# EAGLE board mega_pro-v13 (EAGLE 6.5.0)
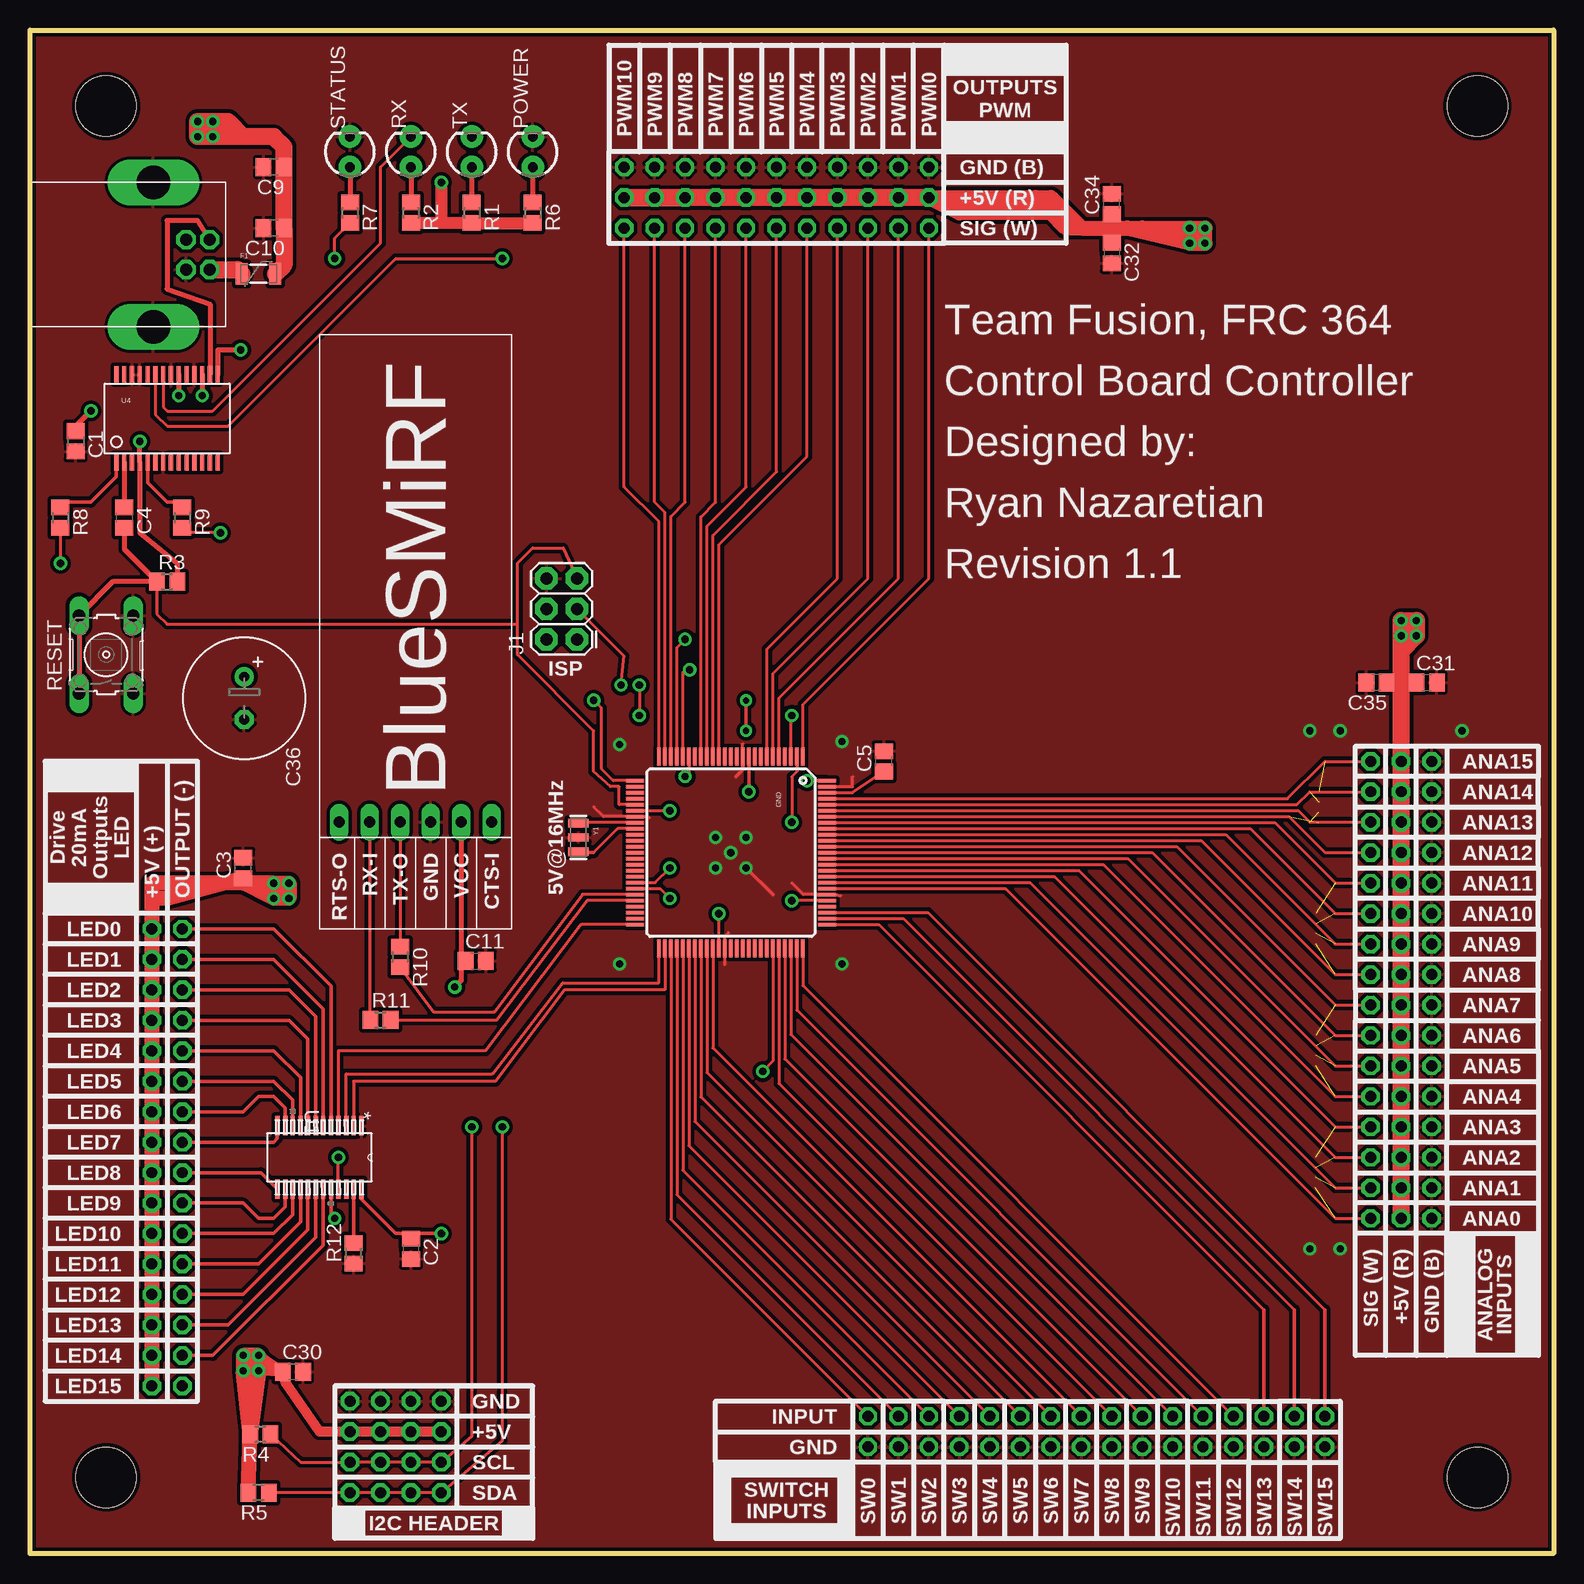
[diagram p0: board, top side]
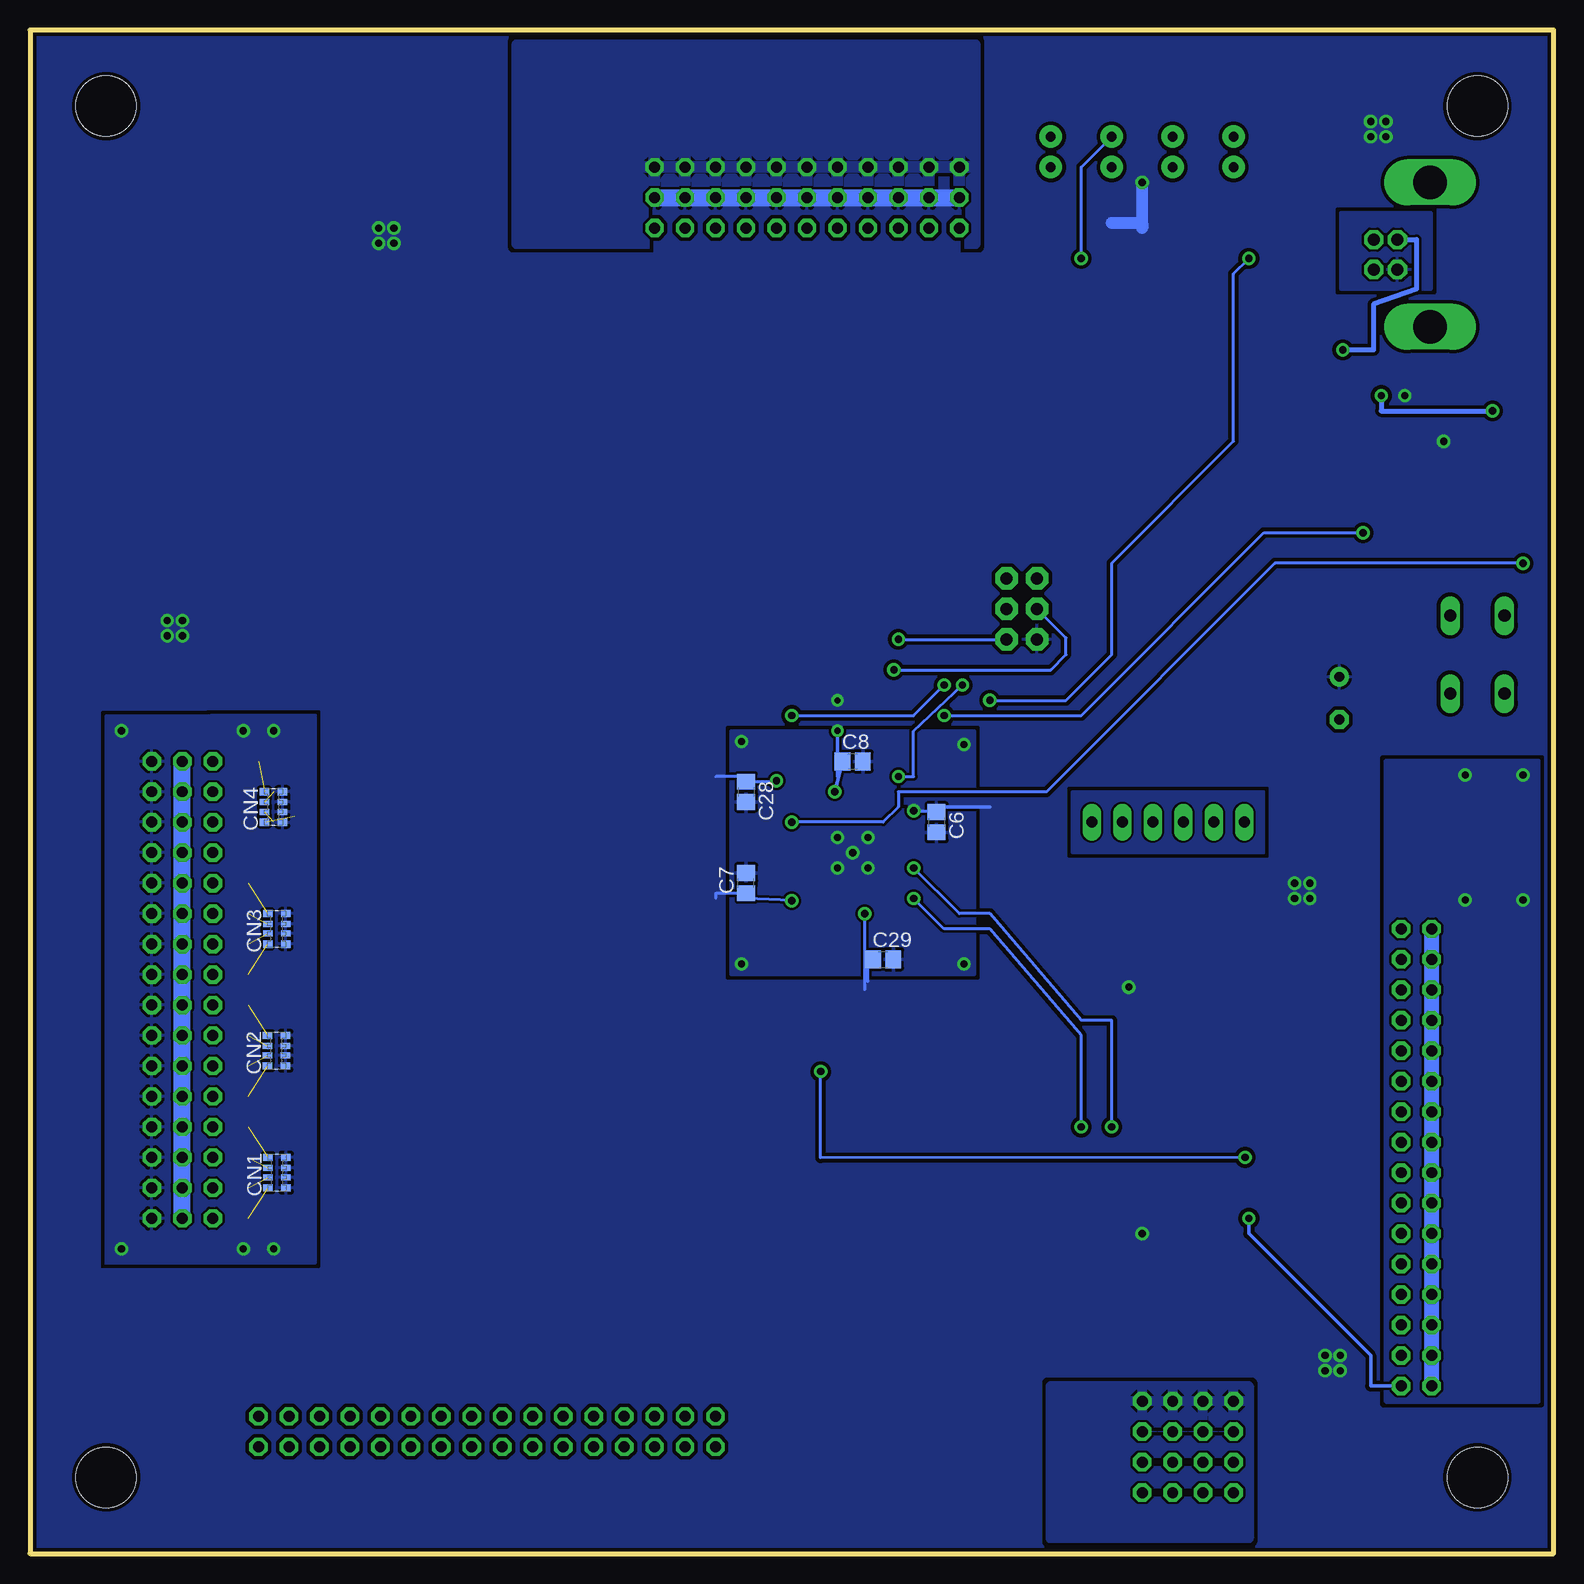
[diagram p1: board, bottom side, seen from below]

Size 127 x 127 mm. Coordinates in mm from the lower left corner, seen from the top.
Outline: 0,0 0,127 127,127 127,0 0,0
Copper layers (1*16): Top 0.035mm / dielectric 1.5mm / Bottom 0.035mm
Design rules "SparkFun": minimum track width 8mil, minimum drill 20mil, track to track 8mil, track to pad 8mil, pad to pad 8mil, via to via 8mil, smd to smd 8mil, copper to edge 10mil, drill to drill 8mil, minimum pad ring 12mil, minimum via ring 10mil, stop-mask expansion 4mil, vias tented up to drill 25mil, thermal gap 10mil
Net classes: 0 default: width 0.203 mm; 1 power: width 0.254 mm
Holes 5.03 mm at 6.35,120.65 120.65,120.65 120.65,6.35 6.35,6.35

## Footprints (pad centres in the part's own frame; a part is rotated, then mirrored left to right if it is on the bottom)
C0805 = smd 1.3 x 1.5: 1 -0.85,0; 2 0.85,0
E3,5-10 = drill 0.813 pad 1.6: + -1.778,0 | drill 0.813 pad 1.6 octagon: - 1.778,0
EXB38V = smd 0.6 x 0.8: 1 -1.275,-0.75; 4 1.275,-0.75; 5 1.275,0.75; 8 -1.275,0.75 | smd 0.5 x 0.8: 2 -0.4,-0.75; 3 0.4,-0.75; 6 0.4,0.75; 7 -0.4,0.75
PTC-1206 = smd 1 x 1.8: 1 -1.4,0; 2 1.4,0
TQFP100 = smd 1.5 x 0.3: 1 -8,6; 2 -8,5.5; 3 -8,5; 4 -8,4.5; 5 -8,4; 6 -8,3.5; 7 -8,3; 8 -8,2.5; 9 -8,2; 10 -8,1.5; 11 -8,1; 12 -8,0.5; 13 -8,0; 14 -8,-0.5; 15 -8,-1; 16 -8,-1.5; 17 -8,-2; 18 -8,-2.5; 19 -8,-3; 20 -8,-3.5; 21 -8,-4; 22 -8,-4.5; 23 -8,-5; 24 -8,-5.5; 25 -8,-6; 51 8,-6; 52 8,-5.5; 53 8,-5; 54 8,-4.5; 55 8,-4; 56 8,-3.5; 57 8,-3; 58 8,-2.5; 59 8,-2; 60 8,-1.5; 61 8,-1; 62 8,-0.5; 63 8,0; 64 8,0.5; 65 8,1; 66 8,1.5; 67 8,2; 68 8,2.5; 69 8,3; 70 8,3.5; 71 8,4; 72 8,4.5; 73 8,5; 74 8,5.5; 75 8,6 | smd 0.3 x 1.5: 26 -6,-8; 27 -5.5,-8; 28 -5,-8; 29 -4.5,-8; 30 -4,-8; 31 -3.5,-8; 32 -3,-8; 33 -2.5,-8; 34 -2,-8; 35 -1.5,-8; 36 -1,-8; 37 -0.5,-8; 38 0,-8; 39 0.5,-8; 40 1,-8; 41 1.5,-8; 42 2,-8; 43 2.5,-8; 44 3,-8; 45 3.5,-8; 46 4,-8; 47 4.5,-8; 48 5,-8; 49 5.5,-8; 50 6,-8; 76 6,8; 77 5.5,8; 78 5,8; 79 4.5,8; 80 4,8; 81 3.5,8; 82 3,8; 83 2.5,8; 84 2,8; 85 1.5,8; 86 1,8; 87 0.5,8; 88 0,8; 89 -0.5,8; 90 -1,8; 91 -1.5,8; 92 -2,8; 93 -2.5,8; 94 -3,8; 95 -3.5,8; 96 -4,8; 97 -4.5,8; 98 -5,8; 99 -5.5,8; 100 -6,8
2X3 = drill 1.016 pad 1.88 octagon: 1 0,0; 2 0,2.54; 3 2.54,0; 4 2.54,2.54; 5 5.08,0; 6 5.08,2.54
LED3MM = drill 0.813 pad 1.88: A -1.27,0; K 1.27,0
R0805 = smd 1.3 x 1.5: 1 -0.85,0; 2 0.85,0
B3F-10XX = drill 1.016 long: 1 -3.251,2.261; 2 3.251,2.261; 3 -3.251,-2.261; 4 3.251,-2.261
DBQ24 = smd 1.6 x 0.356: 1 -2.642,3.505; 2 -2.642,2.845; 3 -2.642,2.235; 4 -2.642,1.575; 5 -2.642,0.965; 6 -2.642,0.305; 7 -2.642,-0.305; 8 -2.642,-0.965; 9 -2.642,-1.575; 10 -2.642,-2.235; 11 -2.642,-2.845; 12 -2.642,-3.505; 13 2.642,-3.505; 14 2.642,-2.845; 15 2.642,-2.235; 16 2.642,-1.575; 17 2.642,-0.965; 18 2.642,-0.305; 19 2.642,0.305; 20 2.642,0.965; 21 2.642,1.575; 22 2.642,2.235; 23 2.642,2.845; 24 2.642,3.505
SSOP28DB = smd 0.348 x 1.397: 1 -4.225,-3.656; 2 -3.575,-3.656; 3 -2.925,-3.656; 4 -2.275,-3.656; 5 -1.625,-3.656; 6 -0.975,-3.656; 7 -0.325,-3.656; 8 0.325,-3.656; 9 0.975,-3.656; 10 1.625,-3.656; 11 2.275,-3.656; 12 2.925,-3.656; 13 3.575,-3.656; 14 4.225,-3.656; 15 4.225,3.656; 16 3.575,3.656; 17 2.925,3.656; 18 2.275,3.656; 19 1.625,3.656; 20 0.975,3.656; 21 0.325,3.656; 22 -0.325,3.656; 23 -0.975,3.656; 24 -1.625,3.656; 25 -2.275,3.656; 26 -2.925,3.656; 27 -3.575,3.656; 28 -4.225,3.656
DIGITALIN = drill 0.914 octagon: DI0 -17.78,2.54; DI1 -15.24,2.54; DI2 -12.7,2.54; DI3 -10.16,2.54; DI4 -7.62,2.54; DI5 -5.08,2.54; DI6 -2.54,2.54; DI7 0,2.54; DI8 2.54,2.54; DI9 5.08,2.54; DI10 7.62,2.54; DI11 10.16,2.54; DI12 12.7,2.54; DI13 15.24,2.54; DI14 17.78,2.54; DI15 20.32,2.54; GND@0 -17.78,0; GND@1 -15.24,0; GND@2 -12.7,0; GND@3 -10.16,0; GND@4 -7.62,0; GND@5 -5.08,0; GND@6 -2.54,0; GND@7 0,0; GND@8 2.54,0; GND@9 5.08,0; GND@10 7.62,0; GND@11 10.16,0; GND@12 12.7,0; GND@13 15.24,0; GND@14 17.78,0; GND@15 20.32,0
PWMHEADER = drill 0.914 octagon: 0 1.27,11.43; 1 1.27,13.97; 2 1.27,16.51; 3 1.27,19.05; 4 1.27,21.59; 5 1.27,24.13; 6 1.27,26.67; 7 1.27,29.21; 8 1.27,31.75; 9 1.27,34.29; 10 1.27,36.83; +5V@3 3.81,36.83; +5V@4 3.81,34.29; +5V@5 3.81,31.75; +5V@6 3.81,29.21; +5V@7 3.81,26.67; +5V@8 3.81,24.13; +5V@9 3.81,21.59; +5V@10 3.81,19.05; +5V@11 3.81,16.51; +5V@12 3.81,13.97; +5V@13 3.81,11.43; GND@3 6.35,36.83; GND@4 6.35,34.29; GND@5 6.35,31.75; GND@6 6.35,29.21; GND@7 6.35,26.67; GND@8 6.35,24.13; GND@9 6.35,21.59; GND@10 6.35,19.05; GND@11 6.35,16.51; GND@12 6.35,13.97; GND@13 6.35,11.43
DIGITALOUT = drill 0.914 octagon: +5V@0 -15.24,-1.27; +5V@1 -12.7,-1.27; +5V@2 -10.16,-1.27; +5V@3 -7.62,-1.27; +5V@4 -5.08,-1.27; +5V@5 -2.54,-1.27; +5V@6 0,-1.27; +5V@7 2.54,-1.27; +5V@8 5.08,-1.27; +5V@9 7.62,-1.27; +5V@10 10.16,-1.27; +5V@11 12.7,-1.27; +5V@12 15.24,-1.27; +5V@13 17.78,-1.27; +5V@14 20.32,-1.27; +5V@15 22.86,-1.27; DO0 -15.24,1.27; DO1 -12.7,1.27; DO2 -10.16,1.27; DO3 -7.62,1.27; DO4 -5.08,1.27; DO5 -2.54,1.27; DO6 0,1.27; DO7 2.54,1.27; DO8 5.08,1.27; DO9 7.62,1.27; DO10 10.16,1.27; DO11 12.7,1.27; DO12 15.24,1.27; DO13 17.78,1.27; DO14 20.32,1.27; DO15 22.86,1.27
ANALOGHEADER = drill 0.914 octagon: 0 1.27,11.43; 1 1.27,13.97; 2 1.27,16.51; 3 1.27,19.05; 4 1.27,21.59; 5 1.27,24.13; 6 1.27,26.67; 7 1.27,29.21; 8 1.27,31.75; 9 1.27,34.29; 10 1.27,36.83; 11 1.27,39.37; 12 1.27,41.91; 13 1.27,44.45; 14 1.27,46.99; 15 1.27,49.53; +5V@0 3.81,11.43; +5V@1 3.81,13.97; +5V@2 3.81,16.51; +5V@3 3.81,19.05; +5V@4 3.81,21.59; +5V@5 3.81,24.13; +5V@6 3.81,26.67; +5V@7 3.81,29.21; +5V@8 3.81,31.75; +5V@9 3.81,34.29; +5V@10 3.81,36.83; +5V@11 3.81,39.37; +5V@12 3.81,41.91; +5V@13 3.81,44.45; +5V@14 3.81,46.99; +5V@15 3.81,49.53; GND@0 6.35,11.43; GND@1 6.35,13.97; GND@2 6.35,16.51; GND@3 6.35,19.05; GND@4 6.35,21.59; GND@5 6.35,24.13; GND@6 6.35,26.67; GND@7 6.35,29.21; GND@8 6.35,31.75; GND@9 6.35,34.29; GND@10 6.35,36.83; GND@11 6.35,39.37; GND@12 6.35,41.91; GND@13 6.35,44.45; GND@14 6.35,46.99; GND@15 6.35,49.53
UE27BC54130-USB = drill 1 octagon: +5V 7.264,14.986; +DATA 4.775,13.005; -DATA 4.775,14.986; GND@0 7.264,13.005 | drill 2.8 long: GND@1 0,10.287; GND@2 12.04,10.287
I2CHEADER = drill 0.914 octagon: GND@0 1.27,1.27; GND@1 3.81,1.27; GND@2 6.35,1.27; GND@3 8.89,1.27; SCL@0 1.27,6.35; SCL@1 3.81,6.35; SCL@2 6.35,6.35; SCL@3 8.89,6.35; SDA@0 1.27,8.89; SDA@1 3.81,8.89; SDA@2 6.35,8.89; SDA@3 8.89,8.89; VCC@0 1.27,3.81; VCC@1 3.81,3.81; VCC@2 6.35,3.81; VCC@3 8.89,3.81
BLUESMIRF = drill 0.914 long: CTS-I 40.64,14.351; GND 40.64,9.271; RTS-O 40.64,1.651; RX-I 40.64,4.191; TX-O 40.64,6.731; VCC 40.64,11.811
RESONATOR-SMD = smd 0.7 x 1.7: 1 -1.2,0; 2 0,0; 3 1.2,0

## Placement (x,y rotation side)
C1  0.1uF  [C0805]  3.81,92.71 270 top
C2  0.1uF  [C0805]  31.75,25.4 270 top
C3  10uF  [C0805]  17.78,57.15 90 top
C4  0.1uF  [C0805]  7.86,86.36 270 top
C5  0.1uF  [C0805]  71.18,66.04 90 top
C6  0.1uF  [C0805]  51.44,60.96 270 bottom
C7  0.1uF  [C0805]  67.31,55.88 90 bottom
C8  0.1uF  [C0805]  58.42,66.04 0 bottom
C9  0.1uF  [C0805]  20.32,115.57 180 top
C10  10uF  [C0805]  20.32,110.49 180 top
C11  10uF  [C0805]  37.16,49.4 0 top
C28  0.1uF  [C0805]  67.31,63.5 270 bottom
C29  0.1uF  [C0805]  55.88,49.53 0 bottom
C30  10uF  [C0805]  21.92,15.16 0 top
C31  10uF  [C0805]  116.43,72.59 0 top
C32  10uF  [C0805]  90.17,108.41 270 top
C34  0.1uF  [C0805]  90.17,112.5 90 top
C35  0.1uF  [C0805]  112.24,72.59 180 top
C36  470uF  [E3,5-10]  17.86,71.3 270 top
CN1  1uF  [EXB38V]  106.4,31.75 90 bottom
CN2  1uF  [EXB38V]  106.45,41.91 90 bottom
CN3  1uF  [EXB38V]  106.43,52.07 90 bottom
CN4  1uF  [EXB38V]  106.71,62.23 90 bottom
F1  500mA  [PTC-1206]  19.05,106.68 0 top
GND  ATMEGA2560AU  [TQFP100]  58.42,58.42 270 top
J1  AVR_SPI_PRG_6PTH  [2X3]  45.59,76.2 90 top
POWER  [LED3MM]  41.91,116.84 90 top
R1  140  [R0805]  36.83,111.76 270 top
R2  157.5  [R0805]  31.75,111.76 270 top
R3  10k  [R0805]  11.43,81 0 top
R4  10k  [R0805]  19.2,9.93 180 top
R5  10k  [R0805]  19.05,5.08 180 top
R6  85  [R0805]  41.91,111.76 270 top
R7  150  [R0805]  26.67,111.76 270 top
R8  1K  [R0805]  2.54,86.36 270 top
R9  1K  [R0805]  12.7,86.36 270 top
R10  1K  [R0805]  30.86,49.73 270 top
R11  1K  [R0805]  29.21,44.48 0 top
R12  2.52K  [R0805]  26.97,25.02 90 top
RESET  [B3F-10XX]  6.35,74.93 90 top
RX  [LED3MM]  31.75,116.84 90 top
STATUS  [LED3MM]  26.67,116.84 90 top
TX  [LED3MM]  36.83,116.84 90 top
U1  TLC59282_DBQ_24  [DBQ24]  24.13,33.02 270 top
U4  FT232RLSSOP  [SSOP28DB]  11.43,94.61 0 top
U$2  DIGITALIN  [DIGITALIN]  87.63,8.89 0 top
U$10  PWMHEADER  [PWMHEADER]  86.36,109.22 90 top
U$11  DIGITALOUTPUTS  [DIGITALOUT]  11.43,36.83 270 top
U$12  ANALOGHEADER  [ANALOGHEADER]  110.49,16.51 0 top
U$14  UE27BC54130-USB  [UE27BC54130-USB]  0,114.3 270 top
U$15  I2CHEADER  [I2CHEADER]  35.56,13.97 180 top
U$19  BLUESMIRF  [BLUESMIRF]  24.13,101.6 270 top
Y1  RESONATORSMD  [RESONATOR-SMD]  45.72,59.69 270 top

## Library data of the parts
C1-C11 C28-C32 C34-C36 R1-R12 = resistor
CN1-CN4 = resistor-dil; OC_FARNELL: unknown; OC_NEWARK: unknown
F1 = SparkFun-PowerIC; PROD_ID: RES-11150
GND J1 U4 Y1 = SparkFun
POWER RX STATUS TX = SparkFun-LED
RESET = switch-omron; MPN: B3F-1000; OC_FARNELL: 176432; OC_NEWARK: 36M3542
U1 = teamFusion; DATASHEETURL: http://www.ti.com/lit/gpn/TLC59282; DESCRIPTION: 16-Channel Constant Current LED Driver with 4-Channel Grouped Delay; FAMILY_NAME: LED DRIVER; GENERIC_PART_NUMBER: TLC59282; INDUSTRY_STD_PKG_TYPE: SSOP/QSOP; MANUFACTURER: Texas Instruments; MANUFACTURER_PART_NUMBER: tlc59282_dbq_24; PACKAGE_DESIGNATOR: DBQ; PIN_COUNT: 24; VENDOR: Texas Instruments
U$2 U$10-U$12 U$14 U$15 U$19 = teamFusion

## Nets
5V [power]: C2.1 C3.1 C6.1 C7.1 C8.1 C9.1 C10.1 C11.1 C28.1 C29.1 C30.1 C31.1 C32.1 C34.1 C35.1 C36.+ F1.2 GND.10 GND.31 GND.61 GND.80 GND.100 J1.2 R1.2 R2.2 R3.2 R4.2 R5.2 R6.2 U1.24 U4.4 U4.20 U$10.+5V@3 U$10.+5V@4 U$10.+5V@5 U$10.+5V@6 U$10.+5V@7 U$10.+5V@8 U$10.+5V@9 U$10.+5V@10 U$10.+5V@11 U$10.+5V@12 U$10.+5V@13 U$11.+5V@0 U$11.+5V@1 U$11.+5V@2 U$11.+5V@3 U$11.+5V@4 U$11.+5V@5 U$11.+5V@6 U$11.+5V@7 U$11.+5V@8 U$11.+5V@9 U$11.+5V@10 U$11.+5V@11 U$11.+5V@12 U$11.+5V@13 U$11.+5V@14 U$11.+5V@15 U$12.+5V@0 U$12.+5V@1 U$12.+5V@2 U$12.+5V@3 U$12.+5V@4 U$12.+5V@5 U$12.+5V@6 U$12.+5V@7 U$12.+5V@8 U$12.+5V@9 U$12.+5V@10 U$12.+5V@11 U$12.+5V@12 U$12.+5V@13 U$12.+5V@14 U$12.+5V@15 U$15.VCC@0 U$15.VCC@1 U$15.VCC@2 U$15.VCC@3 U$19.VCC
A0: CN4.5 GND.97 U$12.15
A1: CN4.6 GND.96 U$12.14
A2: CN4.7 GND.95 U$12.13
A3: CN4.8 GND.94 U$12.12
A4: CN3.5 GND.93 U$12.11
A5: CN3.6 GND.92 U$12.10
A6: CN3.7 GND.91 U$12.9
A7: CN3.8 GND.90 U$12.8
A8: CN2.5 GND.89 U$12.7
A9: CN2.6 GND.88 U$12.6
A10: CN2.7 GND.87 U$12.5
A11: CN2.8 GND.86 U$12.4
A12: CN1.5 GND.85 U$12.3
A13: CN1.6 GND.84 U$12.2
A14: CN1.7 GND.83 U$12.1
A15: CN1.8 GND.82 U$12.0
AREF: C5.1 GND.98
DIO0(RX0-I): GND.2 R8.2
DIO1(TX0-O): GND.3 R9.2
DIO2(PWM0): GND.6 U$10.2
DIO3(PWM1): GND.7 U$10.3
DIO4(PWM2): GND.1 U$10.0
DIO5(PWM3): GND.5 U$10.1
DIO6(PWM4): GND.15 U$10.4
DIO7(PWM5): GND.16 U$10.5
DIO8(PWM6): GND.17 U$10.6
DIO9(PWM7): GND.18 U$10.7
DIO10(PWM8): GND.23 U$10.8
DIO11(PWM9): GND.24 U$10.9
DIO12(PWM10): GND.25 U$10.10
DIO13: GND.26 R7.2
DIO14(TX3): GND.64
DIO15(RX3): GND.63
DIO16(TX2): GND.13
DIO17(RX2): GND.12
DIO18(TX1): GND.46 R11.2
DIO19(RX1): GND.45 R10.2
DIO20(SDA): GND.44 R5.1 U$15.SDA@0 U$15.SDA@1 U$15.SDA@2 U$15.SDA@3
DIO21(SCL): GND.43 R4.1 U$15.SCL@0 U$15.SCL@1 U$15.SCL@2 U$15.SCL@3
DIO22: GND.78 U$2.DI15
DIO23: GND.77 U$2.DI14
DIO24: GND.76 U$2.DI13
DIO25: GND.75 U$2.DI12
DIO26: GND.74 U$2.DI11
DIO27: GND.73 U$2.DI10
DIO28: GND.72 U$2.DI9
DIO29: GND.71 U$2.DI8
DIO30: GND.60 U$2.DI7
DIO31: GND.59 U$2.DI6
DIO32: GND.58 U$2.DI5
DIO33: GND.57 U$2.DI4
DIO34: GND.56 U$2.DI3
DIO35: GND.55 U$2.DI2
DIO36: GND.54 U$2.DI1
DIO37: GND.53 U$2.DI0
DIO38: GND.50 U1.4
DIO39: GND.70 U1.21
DIO40: GND.52 U1.2
DIO41: GND.51 U1.3
DIO42: GND.42
DIO43: GND.41
DIO44(PWM11): GND.40
DIO45(PWM12): GND.39
DIO46(PWM13): GND.38
DIO47: GND.37
DIO48: GND.36
DIO49: GND.35
DIO50(MISO): GND.22 J1.1
DIO51(MOSI): GND.21 J1.4
DIO52(SCK): GND.20 J1.3
DIO53: GND.19
DTR: C4.1 U4.2
GND [power]: C1.2 C2.2 C3.2 C5.2 C6.2 C7.2 C8.2 C9.2 C10.2 C11.2 C28.2 C29.2 C30.2 C31.2 C32.2 C34.2 C35.2 C36.- CN1.1 CN1.2 CN1.3 CN1.4 CN2.1 CN2.2 CN2.3 CN2.4 CN3.1 CN3.2 CN3.3 CN3.4 CN4.1 CN4.2 CN4.3 CN4.4 GND.11 GND.32 GND.62 GND.81 GND.99 J1.6 POWER.K R12.1 RESET.3 RESET.4 STATUS.K U1.1 U4.7 U4.18 U4.21 U4.25 U4.26 U$2.GND@0 U$2.GND@1 U$2.GND@2 U$2.GND@3 U$2.GND@4 U$2.GND@5 U$2.GND@6 U$2.GND@7 U$2.GND@8 U$2.GND@9 U$2.GND@10 U$2.GND@11 U$2.GND@12 U$2.GND@13 U$2.GND@14 U$2.GND@15 U$10.GND@3 U$10.GND@4 U$10.GND@5 U$10.GND@6 U$10.GND@7 U$10.GND@8 U$10.GND@9 U$10.GND@10 U$10.GND@11 U$10.GND@12 U$10.GND@13 U$12.GND@0 U$12.GND@1 U$12.GND@2 U$12.GND@3 U$12.GND@4 U$12.GND@5 U$12.GND@6 U$12.GND@7 U$12.GND@8 U$12.GND@9 U$12.GND@10 U$12.GND@11 U$12.GND@12 U$12.GND@13 U$12.GND@14 U$12.GND@15 U$14.GND@0 U$14.GND@1 U$14.GND@2 U$15.GND@0 U$15.GND@1 U$15.GND@2 U$15.GND@3 U$19.GND Y1.2
N$1: R1.1 TX.A
N$2: POWER.A R6.1
N$3: R7.1 STATUS.A
N$4: F1.1 U$14.+5V
N$5: R2.1 RX.A
N$9: R10.1 U$19.TX-O
N$10: R11.1 U$19.RX-I
N$21: C1.1 U4.17
N$25 [power]: U1.6 U$11.DO1
N$26 [power]: U1.7 U$11.DO2
N$27 [power]: U1.5 U$11.DO0
N$28 [power]: U1.8 U$11.DO3
N$29 [power]: U1.9 U$11.DO4
N$30 [power]: U1.10 U$11.DO5
N$31 [power]: U1.11 U$11.DO6
N$32 [power]: U1.12 U$11.DO7
N$33 [power]: U1.20 U$11.DO15
N$34 [power]: U1.19 U$11.DO14
N$35 [power]: U1.18 U$11.DO13
N$36 [power]: U1.17 U$11.DO12
N$37 [power]: U1.16 U$11.DO11
N$38 [power]: U1.15 U$11.DO10
N$39 [power]: U1.14 U$11.DO9
N$40 [power]: U1.13 U$11.DO8
N$41 [power]: R12.2 U1.23
N$73: GND.33 Y1.1
N$74: GND.34 Y1.3
RESET: C4.2 GND.30 J1.5 R3.1 RESET.1 RESET.2
RXD: R9.1 U4.5
RXLED: RX.K U4.22
TXD: R8.1 U4.1
TXLED: TX.K U4.23
USB_D+: U4.15 U$14.+DATA
USB_D-: U4.16 U$14.-DATA

## Tracks (layer width: path | path; a pad name or v marks a point on that pad's centre or on a via)
5V  (via drill 0.51, 0.6)  (1 unrouted)
  Top 0.254: GND.31 v53.34,61.92 | GND.80 v63.5,54.42 | GND.61 v57.42,53.34 | 90.17,110.49 C32.1 C34.1 | C31.1 C35.1 114.25,72.59 114.3,72.64
  Top 0.305: U1.24 27.64,29.52 30.48,26.67 31.33,26.67 C2.1 32.17,26.67 v34.29,26.67 | GND.10 v59.92,63.5 | GND.100 v64.77,64.42 | v59.69,68.58 v59.69,71.12
  Top 0.406: U4.20 v12.39,96.52 | v9.15,92.71 U4.4 9.15,85.09 12.28,82.55 R3.2 | U$19.VCC 35.94,49.38 | 35.94,49.38 35.94,47.78 35.38,47.22 | C11.1 35.97,49.4 35.94,49.38
  Top 0.813: U$15.VCC@0 U$15.VCC@1 U$15.VCC@2 U$15.VCC@3 24.13,10.16 21.39,14.12 C30.1 v19.05,15.24 | v19.05,16.51 21.06,15.16
  Top 1.016: 34.29,110.91 R1.2 R6.2 | 34.29,110.91 R2.2 | v34.29,114.3 34.29,110.91
  Top 1.27: 83.82,113.03 U$10.+5V@13 77.47,111.76 85.09,111.76 | 83.82,113.03 85.09,113.03 87.63,110.49 | 87.63,110.49 90.17,110.49 91.44,110.49 | 91.44,110.49 92.71,110.49 | 92.71,110.49 v96.67,110.49 | v96.67,110.49 v97.94,110.49 v97.94,109.22 v96.67,109.22 | v96.67,110.49 v96.67,109.22 | v96.67,109.22 92.71,110.49 | v96.67,109.22 91.44,110.49 | 87.63,110.49 86.36,110.49 85.09,111.76 | 85.09,111.76 83.82,113.03 | R5.2 R4.2 | R4.2 v17.78,15.24 | v19.05,16.51 v19.05,15.24 | v19.05,15.24 v17.78,16.51 | v17.78,16.51 v17.78,15.24 | v17.78,15.24 v19.05,16.51 | v19.05,16.51 v17.78,16.51 | v17.78,15.24 v19.05,15.24 | v19.05,15.24 R4.2 | C3.1 11.43,54.61 10.16,54.61 | 10.16,54.61 U$11.+5V@0 U$11.+5V@2 U$11.+5V@3 U$11.+5V@4 U$11.+5V@5 U$11.+5V@6 U$11.+5V@7 U$11.+5V@8 U$11.+5V@9 U$11.+5V@10 U$11.+5V@11 U$11.+5V@12 U$11.+5V@13 U$11.+5V@14 U$11.+5V@15 | v20.32,55.88 17.78,55.88 | 17.78,55.88 10.16,55.88 10.16,54.61 | v20.32,55.88 v21.59,55.88 v21.59,54.61 v20.32,54.61 | v20.32,54.61 v20.32,55.88 | v20.32,54.61 17.78,55.88
  Top 1.422: U$10.+5V@13 U$10.+5V@12 U$10.+5V@11 U$10.+5V@10 U$10.+5V@9 U$10.+5V@8 U$10.+5V@7 U$10.+5V@6 U$10.+5V@5 | U$10.+5V@5 U$10.+5V@3 U$10.+5V@4 U$10.+5V@5 | U$12.+5V@0 U$12.+5V@1 U$12.+5V@2 U$12.+5V@3 U$12.+5V@4 U$12.+5V@5 U$12.+5V@6 U$12.+5V@7 U$12.+5V@8 U$12.+5V@9 U$12.+5V@10 U$12.+5V@11 U$12.+5V@12 U$12.+5V@13 U$12.+5V@14 114.3,72.64 114.3,75.23 | 114.3,75.23 v114.3,76.5 | v114.3,76.5 v114.3,77.78 v115.57,77.78 v115.57,76.5 | v114.3,76.5 v115.57,76.5 | v115.57,76.5 114.3,75.23 | 17.78,118.11 20.32,118.11 21.17,117.26 C9.1 C10.1 21.17,107.4 F1.2 | 17.78,118.11 v15.24,118.11 | v15.24,118.11 v13.97,118.11 v13.97,119.38 v15.24,119.38 | v15.24,119.38 v15.24,118.11 | v15.24,119.38 16.51,119.38 17.78,118.11
  Bottom 0.254: v64.77,64.42 64.77,64.35 C28.1 67.31,64.77 69.85,64.77 | v63.5,54.42 67.31,54.61 C7.1 69.85,55.03 69.85,54.61 | v57.42,53.34 57.42,46.99 | 59.69,66.04 C8.1 | 57.15,47.68 57.15,49.53 C29.1
  Bottom 0.305: v59.92,63.5 59.69,64.35 C8.1 | v53.34,61.92 C6.1 50.8,62.23 46.99,62.23 | 59.69,64.77 59.69,66.04 v59.69,68.58
  Bottom 1.016: 34.29,110.91 R1.2 | 34.29,110.91 34.29,110.49 | 34.29,110.91 v34.29,114.3
  Bottom 1.27: U$11.+5V@15 U$11.+5V@1 U$11.+5V@0
  Bottom 1.422: U$10.+5V@13 U$10.+5V@3 | U$12.+5V@0 U$12.+5V@15
  other vias: 35.41,47.22
  pour Bottom (isolate 0.305, rank 2): 0,127 127,127 127,0 0,0
A0  (1 unrouted)
  Top 0.254: GND.97 104.83,62.92 107.95,66.04 U$12.15
A1  (1 unrouted)
  Top 0.254: GND.96 105.6,62.42 106.68,63.5 U$12.14
A2  (1 unrouted)
  Top 0.254: GND.95 105.72,61.92 106.68,60.96 U$12.13
A3  (1 unrouted)
  Top 0.254: GND.94 104.95,61.42 107.95,58.42 U$12.12
A4  (1 unrouted)
  Top 0.254: GND.93 103.76,60.92 108.8,55.88 U$12.11
A5  (1 unrouted)
  Top 0.254: GND.92 101.72,60.42 108.8,53.34 U$12.10
A6  (1 unrouted)
  Top 0.254: GND.91 99.68,59.92 108.8,50.8 U$12.9
A7  (1 unrouted)
  Top 0.254: GND.90 97.64,59.42 108.8,48.26 U$12.8
A8  (1 unrouted)
  Top 0.254: GND.89 95.6,58.92 108.8,45.72 U$12.7
A9  (1 unrouted)
  Top 0.254: GND.88 93.56,58.42 108.8,43.18 U$12.6
A10  (1 unrouted)
  Top 0.254: GND.87 91.52,57.92 108.8,40.64 U$12.5
A11  (1 unrouted)
  Top 0.254: GND.86 89.48,57.42 108.8,38.1 U$12.4
A12  (1 unrouted)
  Top 0.254: GND.85 87.44,56.92 108.8,35.56 U$12.3
A13  (1 unrouted)
  Top 0.254: GND.84 85.4,56.42 108.8,33.02 U$12.2
A14  (1 unrouted)
  Top 0.254: GND.83 83.36,55.92 108.8,30.48 U$12.1
A15  (1 unrouted)
  Top 0.254: GND.82 81.32,55.42 108.8,27.94 U$12.0
AREF
  Top 0.254: GND.98 68.58,63.42 C5.1
DIO0(RX0-I)  (via drill 0.6)
  Top 0.254: R8.2 v2.54,82.55 | GND.2 63.92,65.19 63.5,64.77 v63.5,60.96
  Bottom 0.254: v2.54,82.55 23.22,82.55 42.27,63.5 54.61,63.5 54.61,62.23 55.88,60.96 v63.5,60.96
DIO1(TX0-O)  (via drill 0.6)
  Top 0.254: GND.3 63.42,69.77 v63.5,69.85 | v50.8,72.39 v50.8,69.85 | R9.2 13.12,85.09 v15.88,85.09
  Bottom 0.254: v63.5,69.85 53.34,69.85 v50.8,72.39 | v50.8,69.85 39.37,69.85 24.13,85.09 v15.88,85.09
DIO2(PWM0)
  Top 0.254: GND.6 61.92,73.35 69.85,81.28 U$10.2
DIO3(PWM1)
  Top 0.254: GND.7 61.42,75.39 67.31,81.28 U$10.3
DIO4(PWM2)
  Top 0.254: GND.1 64.42,70.77 74.93,81.28 U$10.0
DIO5(PWM3)
  Top 0.254: GND.5 62.42,71.31 72.39,81.28 U$10.1
DIO6(PWM4)
  Top 0.254: GND.15 57.42,84.09 64.77,91.44 U$10.4
DIO7(PWM5)
  Top 0.254: GND.16 56.92,84.86 62.23,90.17 U$10.5
DIO8(PWM6)
  Top 0.254: GND.17 56.42,85.63 59.69,88.9 U$10.6
DIO9(PWM7)
  Top 0.254: GND.18 55.92,86.4 57.15,87.63 U$10.7
DIO10(PWM8)
  Top 0.254: GND.23 53.42,86.44 54.61,87.63 U$10.8
DIO11(PWM9)
  Top 0.254: GND.24 52.92,86.78 52.07,87.63 U$10.9
DIO12(PWM10)
  Top 0.254: GND.25 52.42,86.01 49.53,88.9 U$10.10
DIO13  (via drill 0.6)
  Top 0.254: GND.26 48.61,64.42 47.62,65.41 47.62,70.48 v46.99,71.12 | v25.4,107.95 25.4,109.64 R7.2
  Bottom 0.254: v46.99,71.12 40.64,71.12 36.83,74.93 36.83,82.55 26.67,92.71 26.67,106.68 v25.4,107.95
DIO18(TX1)
  Top 0.254: GND.46 46.43,54.42 38.91,44.48 R11.2
DIO19(RX1)
  Top 0.254: GND.45 46.05,54.95 38.71,45.16 33.63,45.16 R10.2
DIO20(SDA)  (via drill 0.6)
  Top 0.254: R5.1 U$15.SDA@3 U$15.SDA@2 U$15.SDA@1 U$15.SDA@0 39.37,9.4 v39.37,35.56 | GND.44 52.53,55.42 v53.34,54.61
  Bottom 0.254: v39.37,35.56 39.37,43.18 46.99,52.07 50.8,52.07 v53.34,54.61
DIO21(SCL)  (via drill 0.6)
  Top 0.254: GND.43 52.11,55.92 v53.34,57.15 | v36.83,35.56 36.83,9.75 U$15.SCL@0 U$15.SCL@1 U$15.SCL@2 U$15.SCL@3 22.58,7.62 R4.1
  Bottom 0.254: v36.83,35.56 36.83,44.45 39.37,44.45 46.99,53.34 49.53,53.34 v53.34,57.15
DIO22
  Top 0.254: GND.78 74.85,53.42 107.95,20.32
  Top 0.305: 107.95,20.32 U$2.DI15
DIO23
  Top 0.254: GND.77 72.81,52.92 105.41,20.32
  Top 0.305: 105.41,20.32 U$2.DI14
DIO24
  Top 0.254: GND.76 70.77,52.42 102.87,20.32
  Top 0.305: 102.87,20.32 U$2.DI13
DIO25
  Top 0.254: GND.75 64.42,47.34 U$2.DI12
DIO26
  Top 0.254: GND.74 63.92,45.3 U$2.DI11
DIO27
  Top 0.254: GND.73 63.42,43.26 U$2.DI10
DIO28
  Top 0.254: GND.72 62.92,41.22 U$2.DI9
DIO29
  Top 0.254: GND.71 62.42,39.18 U$2.DI8
DIO30
  Top 0.254: GND.60 56.92,42.14 U$2.DI7
DIO31
  Top 0.254: GND.59 56.42,40.1 U$2.DI6
DIO32
  Top 0.254: GND.58 55.92,38.06 U$2.DI5
DIO33
  Top 0.254: GND.57 55.42,36.02 U$2.DI4
DIO34
  Top 0.254: GND.56 54.92,33.98 U$2.DI3
DIO35
  Top 0.254: GND.55 54.42,31.94 U$2.DI2
DIO36
  Top 0.254: GND.54 53.92,29.9 U$2.DI1
DIO37
  Top 0.254: GND.53 53.42,27.86 U$2.DI0
DIO38
  Top 0.254: GND.50 45.95,52.42 37.97,41.91 25.7,41.91 U1.4
DIO39  (via drill 0.6)
  Top 0.254: U1.21 v25.7,33.02 | GND.70 61.92,41.05 v61.09,40.18
  Bottom 0.254: v25.7,33.02 61.11,32.99 v61.09,40.18
DIO40
  Top 0.254: GND.52 52.92,46.99 44.58,46.99 38.81,39.37 26.98,39.37 U1.2
DIO41
  Top 0.254: U1.3 26.36,39.98 38.56,39.98 44.4,47.57 52.42,47.57 GND.51
DIO50(MISO)  (via drill 0.6)
  Top 0.254: GND.22 53.92,75.51 v54.61,76.2
  Bottom 0.254: v54.61,76.2 J1.1
DIO51(MOSI)  (via drill 0.6)
  Top 0.254: GND.21 54.42,73.47 v54.99,73.66
  Bottom 0.254: v54.99,73.66 41.91,73.66 40.64,74.93 40.64,76.33 J1.4
DIO52(SCK)  (via drill 0.6)
  Top 0.254: GND.20 54.92,65.08 v54.61,64.77 | v49.28,72.39 49.53,74.8 J1.3
  Bottom 0.254: v54.61,64.77 53.34,64.77 53.34,68.58 v49.28,72.39
DTR
  Top 0.406: U4.2 C4.1
GND  (via drill 0.6)
  Top 0.254: GND.99 68.58,63.92 68.58,64.77 | GND.32 47.8,61.42 46.99,62.23 | GND.81 64.46,54.92 63.5,55.88 | GND.62 57.92,51.44 58.22,51.74 | 65.61,54.91 67.31,54.91 67.56,54.81 | GND.11 59.41,67.51 | 59.41,65.43 GND.11 | GND.11 | 57.91,50.83 57.91,49.1 | 50.04,61.42 51.54,61.42 51.64,61.32
  Top 0.305: 61.92,54.92 v59.69,57.15 | GND.11 59.42,65.35 58.84,64.77
  other vias: 106.68,25.4 106.68,68.58 119.38,68.58 119.38,25.4 109.22,25.4 109.22,68.58 57.15,59.69 57.15,57.15 59.69,59.69 67.69,67.69 67.69,49.15 49.15,49.15 58.42,58.42 49.15,67.44 2.54,64.9 7.37,64.9 2.54,54.48 7.37,54.48
  pour Top (isolate 0.305): 0,127 127,127 127,0 0,0
  pour Bottom: 103.23,24.21 120.65,24.13 120.65,69.85 103.23,69.93
  pour Bottom: 48.26,125.73 48.26,109.22 86.36,109.22 86.36,125.73
  pour Bottom: 10.16,105.41 10.16,111.76 17.78,111.76 17.78,105.41
  pour Bottom: 41.91,1.27 41.91,13.97 25.4,13.97 25.4,1.27
  pour Bottom: 1.27,12.7 1.27,66.04 13.97,66.04 13.97,12.7
  pour Bottom: 48.26,48.26 48.26,68.58 68.58,68.58 68.58,48.26
N$1
  Top 0.406: TX.A R1.1
N$2
  Top 0.406: POWER.A R6.1
N$3
  Top 0.406: STATUS.A R7.1
N$4
  Top 1.422: U$14.+5V 17.29,107.04 F1.1
N$5
  Top 0.406: RX.A R2.1
N$8
  pour Bottom: 40.13,58.42 24.13,58.42 24.13,63.5 40.13,63.5
N$9
  Top 0.254: U$19.TX-O R10.1
N$10
  Top 0.254: U$19.RX-I 28.32,44.51
  Top 0.406: 28.32,44.51 R11.1
N$21  (via drill 0.6)
  Top 0.406: U4.17 v14.36,96.52 | v5.08,95.25 3.81,93.98 C1.1
  Bottom 0.406: v14.36,96.52 14.36,95.25 v5.08,95.25
N$25
  Top 0.305: U1.6 24.43,45.41 20.32,49.53 U$11.DO1
N$26
  Top 0.305: 13.97,46.99 U$11.DO2 21.59,46.99 23.82,44.76 U1.7
N$27
  Top 0.305: U1.5 25.09,47.3 20.32,52.07 U$11.DO0
N$28
  Top 0.305: U1.8 23.16,42.88 21.59,44.45 U$11.DO3
N$29
  Top 0.305: U1.9 22.55,39.67 20.32,41.91 U$11.DO4
N$30
  Top 0.305: U1.10 21.89,37.8 20.32,39.37 U$11.DO5
N$31
  Top 0.305: U1.11 21.29,37.13 20.32,38.1 19.05,38.1 17.78,36.83 U$11.DO6
N$32
  Top 0.305: U1.12 20.62,34.59 20.32,34.29 U$11.DO7
N$33  (via drill 0.6)
  Top 0.305: U1.20 25.09,28.25 v25.4,27.94
  Bottom 0.305: v25.4,27.94 25.4,26.67 15.24,16.51 15.24,13.97 U$11.DO15
N$34
  Top 0.305: U1.19 24.43,25.7 15.24,16.51 U$11.DO14
N$35
  Top 0.305: U1.18 23.82,26.36 16.51,19.05 U$11.DO13
N$36
  Top 0.305: U1.17 23.16,26.98 17.78,21.59 U$11.DO12
N$37
  Top 0.305: U1.16 22.55,27.64 19.05,24.13 U$11.DO11
N$38
  Top 0.305: U1.15 21.89,28.25 20.32,26.67 U$11.DO10
N$39
  Top 0.305: U1.14 21.29,28.91 20.32,27.94 19.05,27.94 17.78,29.21 U$11.DO9
N$40
  Top 0.305: U$11.DO8 19.25,31.75 U1.13
N$41
  Top 0.305: U1.23 R12.2
N$73
  Top 0.254: GND.33 45.75,60.92
  Top 0.406: 45.75,60.92 Y1.1
N$74
  Top 0.254: GND.34 48.99,60.42 46.99,58.42
  Top 0.305: 46.99,58.42 45.79,58.42
  Top 0.406: 45.79,58.42 Y1.3
RESET
  Top 0.254: GND.30 49.11,62.42 49.12,63.93 48.39,63.93 46.97,65.2 46.99,68.58 40.64,74.93 40.64,77.47 | 40.64,77.47 40.64,82.55 41.91,83.82 44.45,83.82 44.48,83.74 J1.5 | R3.1 10.58,78.32 11.43,77.47 40.64,77.47
  Top 0.406: RESET.1 RESET.2 6.91,81 R3.1 7.86,83.73 C4.2
RXD
  Top 0.305: U4.5 9.8,89.25 11.43,87.63 12.28,87.63 R9.1
RXLED
  Top 0.254: U4.22 11.11,95.58 11.43,95.25 15.24,95.25 29.21,109.22 29.21,115.57 RX.K
TXD
  Top 0.305: U4.1 7.21,89.75 5.08,87.63 2.96,87.63 R8.1
TXLED  (via drill 0.6)
  Top 0.254: U4.23 10.46,94.95 11.43,93.98 16.51,93.98 30.48,107.95 v39.37,107.95
  Bottom 0.254: v39.37,107.95 39.37,115.57 TX.K
USB_D+  (via drill 0.6)
  Top 0.406: v17.56,100.33 15.65,100.33 U4.15
  Bottom 0.406: U$14.+DATA 11.43,109.53 11.43,105.41 15.01,104.14 15.01,100.33 v17.56,100.33
USB_D-
  Top 0.406: U$14.-DATA 13.97,111.12 11.43,111.12 11.43,105.41 15.01,104.14 U4.16

## Text on the board
tPlace: ISP | 5V@16MHz
tNames: Team Fusion, FRC 364 | Control Board Controller | Designed by: | Ryan Nazaretian | Revision 1.1